# Altium PCB telemetry_RF_pcb_r4.PcbDoc (part 3 of 3)
Units mil, origin at the board's own origin, x right, y up, seen from the top; angles counter-clockwise.
Board outline 3620 x 3014 mil, 2 copper layers (Top Layer, Bottom Layer); 34 components, 32 nets, 214 pads, 35 vias.
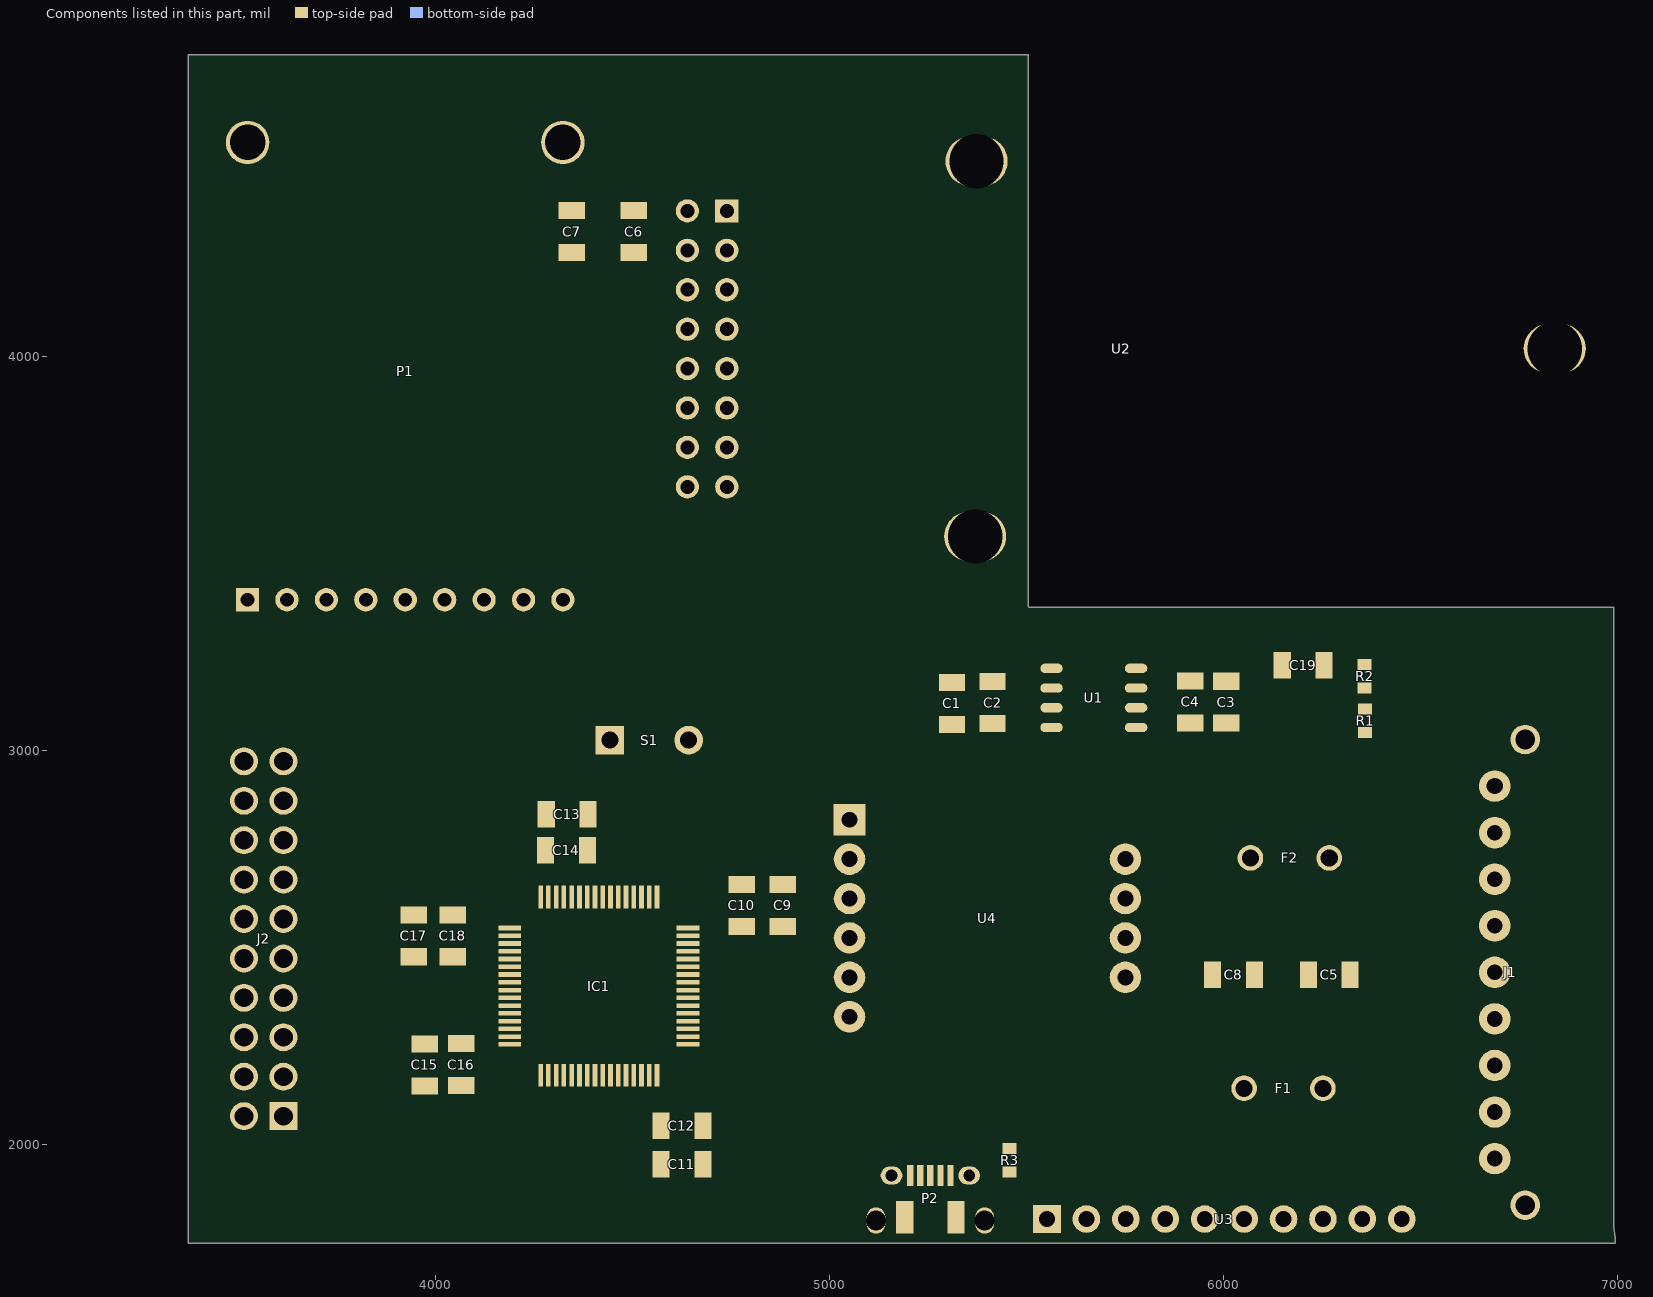
[diagram p3: the components of this part, seen from the top]

## Via types
v1: diameter 20, hole 7.87, Top Layer to Bottom Layer, 21 vias
v2: diameter 20, hole 8, Top Layer to Bottom Layer, 14 vias

## Nets (pads, with @x,y where several pads share a name; then routed paths per layer and width w, separated by ;. In a path a pad name is that pad's centre, name@x,y a point inside that pad or via, vN(x,y) a via of type N, cw(c..) or ccw(c..) an arc to the next point about the centre after c; other vN are vias at no path point) (continued)
copper on no net: (continued)
  Top Layer w1: 4761.84,4598.63 4793.84,4598.63 ; 4761.84,4599.63 4793.84,4599.63 ; 4761.84,4645.63 4775.84,4645.63 ; 4761.84,4692.63 4775.84,4692.63 ; 4762.84,4517.63 4791.84,4517.63 ; 4762.84,4520.63 4763.84,4520.63 ; 4762.84,4560.63 4793.84,4560.63 ; 4762.84,4561.63 4793.84,4561.63 ; 4762.84,4596.63 4793.84,4596.63 ; 4762.84,4597.63 4793.84,4597.63 ; 4762.84,4644.63 4801.84,4644.63 ; 4762.84,4693.63 4781.84,4693.63 ; 4763.84,4518.63 4791.84,4518.63 ; 4763.84,4519.63 4791.84,4519.63 ; 4763.84,4562.63 4793.84,4562.63 ; 4763.84,4563.63 4793.84,4563.63 ; 4763.84,4594.63 4793.84,4594.63 ; 4763.84,4595.63 4793.84,4595.63 ; 4763.84,4694.63 4800.84,4694.63 ; 4764.84,4520.63 4791.84,4520.63 ; 4764.84,4521.63 4792.84,4521.63 ; 4764.84,4539.63 4765.84,4539.63 ; 4764.84,4564.63 4793.84,4564.63 ; 4764.84,4565.63 4793.84,4565.63 ; 4764.84,4592.63 4793.84,4592.63 ; 4764.84,4593.63 4793.84,4593.63 ; 4764.84,4617.63 4765.84,4617.63 ; 4764.84,4643.63 4800.84,4643.63 ; 4765.84,4522.63 4792.84,4522.63 ; 4765.84,4523.63 4792.84,4523.63 ; 4765.84,4524.63 4792.84,4524.63 ; 4765.84,4566.63 4793.84,4566.63 ; 4765.84,4567.63 4793.84,4567.63 ; 4765.84,4568.63 4793.84,4568.63 ; 4765.84,4569.63 4793.84,4569.63 ; 4765.84,4587.63 4793.84,4587.63 ; 4765.84,4588.63 4793.84,4588.63 ; 4765.84,4589.63 4793.84,4589.63 ; 4765.84,4590.63 4793.84,4590.63 ; 4765.84,4591.63 4793.84,4591.63 ; 4765.84,4642.63 4799.84,4642.63 ; 4765.84,4695.63 4799.84,4695.63 ; 4766.84,4525.63 4792.84,4525.63 ; 4766.84,4526.63 4793.84,4526.63 ; 4766.84,4527.63 4793.84,4527.63 ; 4766.84,4528.63 4793.84,4528.63 ; 4766.84,4529.63 4793.84,4529.63 ; 4766.84,4530.63 4793.84,4530.63 ; 4766.84,4531.63 4793.84,4531.63 ; 4766.84,4532.63 4793.84,4532.63 ; 4766.84,4533.63 4793.84,4533.63 ; 4766.84,4534.63 4793.84,4534.63 ; 4766.84,4535.63 4793.84,4535.63 ; 4766.84,4536.63 4793.84,4536.63 ; 4766.84,4537.63 4793.84,4537.63 ; 4766.84,4538.63 4793.84,4538.63 ; 4766.84,4539.63 4793.84,4539.63 ; 4766.84,4540.63 4793.84,4540.63 ; 4766.84,4541.63 4793.84,4541.63 ; 4766.84,4542.63 4793.84,4542.63 ; 4766.84,4570.63 4793.84,4570.63 ; 4766.84,4571.63 4793.84,4571.63 ; 4766.84,4572.63 4793.84,4572.63 ; 4766.84,4573.63 4793.84,4573.63 ; 4766.84,4574.63 4793.84,4574.63 ; 4766.84,4575.63 4793.84,4575.63 ; 4766.84,4576.63 4793.84,4576.63 ; 4766.84,4577.63 4793.84,4577.63 ; 4766.84,4578.63 4793.84,4578.63 ; 4766.84,4579.63 4793.84,4579.63 ; 4766.84,4580.63 4793.84,4580.63 ; 4766.84,4581.63 4793.84,4581.63 ; 4766.84,4582.63 4793.84,4582.63 ; 4766.84,4583.63 4793.84,4583.63 ; 4766.84,4584.63 4793.84,4584.63 ; 4766.84,4585.63 4793.84,4585.63 ; 4766.84,4586.63 4793.84,4586.63 ; 4766.84,4614.63 4793.84,4614.63 ; 4766.84,4615.63 4793.84,4615.63 ; 4766.84,4616.63 4793.84,4616.63 ; 4766.84,4617.63 4793.84,4617.63 ; 4766.84,4618.63 4793.84,4618.63 ; 4766.84,4619.63 4793.84,4619.63 ; 4766.84,4620.63 4793.84,4620.63 ; 4766.84,4621.63 4793.84,4621.63 ; 4766.84,4622.63 4793.84,4622.63 ; 4766.84,4623.63 4793.84,4623.63 ; 4766.84,4624.63 4793.84,4624.63 ; 4766.84,4641.63 4797.84,4641.63 ; 4766.84,4654.63 4767.84,4654.63 ; 4766.84,4696.63 4797.84,4696.63 ; 4767.84,4685.63 4768.84,4685.63 ; 4768.84,4640.63 4795.84,4640.63 ; 4768.84,4651.63 4769.84,4651.63 ; 4768.84,4686.63 4769.84,4686.63 ; 4768.84,4697.63 4796.84,4697.63 ; 4769.84,4650.63 4770.84,4650.63 ; 4769.84,4687.63 4770.84,4687.63 ; 4770.84,4639.63 4793.84,4639.63 ; 4770.84,4649.63 4771.84,4649.63 ; 4770.84,4688.63 4771.84,4688.63 ; 4770.84,4698.63 4794.84,4698.63 ; 4772.84,4699.63 4791.84,4699.63 ; 4773.84,4638.63 4791.84,4638.63 ; 4776.84,4700.63 4787.84,4700.63 ; 4778.84,4637.63 4786.84,4637.63 ; 4779.84,4500.63 4780.84,4500.63 ; 4783.84,4693.63 4801.84,4693.63 ; 4786.84,4507.63 4787.84,4507.63 ; 4788.84,4636.63 4789.84,4636.63 ; 4788.84,4645.63 4802.84,4645.63 ; 4788.84,4692.63 4802.84,4692.63 ; 4789.84,4647.63 4790.84,4647.63 ; 4790.84,4646.63 4803.84,4646.63 ; 4791.84,4689.63 4792.84,4689.63 ; 4791.84,4691.63 4803.84,4691.63 ; 4792.84,4647.63 4804.84,4647.63 ; 4792.84,4649.63 4793.84,4649.63 ; 4792.84,4690.63 4804.84,4690.63 ; 4794.84,4529.63 4795.84,4529.63 ; 4794.84,4648.63 4805.84,4648.63 ; 4794.84,4689.63 4805.84,4689.63 ; 4795.84,4649.63 4805.84,4649.63 ; 4795.84,4652.63 4796.84,4652.63 ; 4795.84,4688.63 4805.84,4688.63 ; 4796.84,4650.63 4806.84,4650.63 ; 4796.84,4653.63 4797.84,4653.63 ; 4796.84,4684.63 4797.84,4684.63 ; 4796.84,4687.63 4806.84,4687.63 ; 4797.84,4651.63 4806.84,4651.63 ; 4797.84,4652.63 4807.84,4652.63 ; 4797.84,4685.63 4807.84,4685.63 ; 4797.84,4686.63 4807.84,4686.63 ; 4798.84,4551.63 4799.84,4551.63 ; 4798.84,4552.63 4799.84,4552.63 ; 4798.84,4561.63 4799.84,4561.63 ; 4798.84,4653.63 4808.84,4653.63 ; 4798.84,4654.63 4808.84,4654.63 ; 4798.84,4680.63 4799.84,4680.63 ; 4798.84,4684.63 4808.84,4684.63 ; 4799.84,4655.63 4808.84,4655.63 ; 4799.84,4656.63 4809.84,4656.63 ; 4799.84,4682.63 4808.84,4682.63 ; 4799.84,4683.63 4808.84,4683.63 ; 4800.84,4549.63 4831.84,4549.63 ; 4800.84,4550.63 4830.84,4550.63 ; 4800.84,4551.63 4829.84,4551.63 ; 4800.84,4552.63 4829.84,4552.63 ; 4800.84,4553.63 4828.84,4553.63 ; 4800.84,4554.63 4828.84,4554.63 ; 4800.84,4555.63 4828.84,4555.63 ; 4800.84,4556.63 4828.84,4556.63 ; 4800.84,4557.63 4828.84,4557.63 ; 4800.84,4558.63 4828.84,4558.63 ; 4800.84,4559.63 4828.84,4559.63 ; 4800.84,4560.63 4828.84,4560.63 ; 4800.84,4561.63 4828.84,4561.63 ; 4800.84,4562.63 4829.84,4562.63 ; 4800.84,4563.63 4829.84,4563.63 ; 4800.84,4564.63 4830.84,4564.63 ; 4800.84,4657.63 4809.84,4657.63 ; 4800.84,4658.63 4809.84,4658.63 ; 4800.84,4665.63 4801.84,4665.63 ; 4800.84,4672.63 4801.84,4672.63 ; 4800.84,4679.63 4809.84,4679.63 ; 4800.84,4680.63 4809.84,4680.63 ; 4800.84,4681.63 4809.84,4681.63 ; 4801.84,4546.63 4838.84,4546.63 ; 4801.84,4547.63 4834.84,4547.63 ; 4801.84,4548.63 4832.84,4548.63 ; 4801.84,4565.63 4830.84,4565.63 ; 4801.84,4566.63 4831.84,4566.63 ; 4801.84,4567.63 4833.84,4567.63 ; 4801.84,4659.63 4810.84,4659.63 ; 4801.84,4660.63 4810.84,4660.63 ; 4801.84,4661.63 4810.84,4661.63 ; 4801.84,4662.63 4810.84,4662.63 ; 4801.84,4675.63 4810.84,4675.63 ; 4801.84,4676.63 4810.84,4676.63 ; 4801.84,4677.63 4810.84,4677.63 ; 4801.84,4678.63 4810.84,4678.63 ; 4802.84,4543.63 4893.84,4543.63 ; 4802.84,4544.63 4893.84,4544.63 ; 4802.84,4545.63 4893.84,4545.63 ; 4802.84,4568.63 4834.84,4568.63 ; 4802.84,4569.63 4837.84,4569.63 ; 4802.84,4663.63 4810.84,4663.63 ; 4802.84,4664.63 4810.84,4664.63 ; 4802.84,4665.63 4811.84,4665.63 ; 4802.84,4666.63 4811.84,4666.63 ; 4802.84,4667.63 4811.84,4667.63 ; 4802.84,4668.63 4811.84,4668.63 ; 4802.84,4669.63 4811.84,4669.63 ; 4802.84,4670.63 4811.84,4670.63 ; 4802.84,4671.63 4811.84,4671.63 ; 4802.84,4672.63 4811.84,4672.63 ; 4802.84,4673.63 4810.84,4673.63 ; 4802.84,4674.63 4810.84,4674.63 ; 4803.84,4541.63 4893.84,4541.63 ; 4803.84,4542.63 4893.84,4542.63 ; 4803.84,4570.63 4840.84,4570.63 ; 4803.84,4571.63 4845.84,4571.63 ; 4803.84,4596.63 4831.84,4596.63 ; 4803.84,4597.63 4831.84,4597.63 ; 4803.84,4598.63 4831.84,4598.63 ; 4803.84,4599.63 4831.84,4599.63 ; 4803.84,4600.63 4831.84,4600.63 ; 4803.84,4601.63 4832.84,4601.63 ; 4803.84,4602.63 4832.84,4602.63 ; 4804.84,4540.63 4894.84,4540.63 ; 4804.84,4572.63 4852.84,4572.63 ; 4804.84,4603.63 4833.84,4603.63 ; 4804.84,4604.63 4833.84,4604.63 ; 4804.84,4605.63 4834.84,4605.63 ; 4804.84,4606.63 4834.84,4606.63 ; 4804.84,4646.63 4805.84,4646.63 ; 4805.84,4538.63 4894.84,4538.63 ; 4805.84,4539.63 4894.84,4539.63 ; 4805.84,4573.63 4858.84,4573.63 ; 4805.84,4607.63 4836.84,4607.63 ; 4805.84,4608.63 4837.84,4608.63 ; 4806.84,4537.63 4865.84,4537.63 ; 4806.84,4574.63 4861.84,4574.63 ; 4806.84,4575.63 4864.84,4575.63 ; 4806.84,4609.63 4839.84,4609.63 ; 4806.84,4610.63 4843.84,4610.63 ; 4807.84,4536.63 4864.84,4536.63 ; 4807.84,4576.63 4893.84,4576.63 ; 4807.84,4611.63 4891.84,4611.63 ; 4807.84,4612.63 4891.84,4612.63 ; 4808.84,4535.63 4863.84,4535.63 ; 4808.84,4613.63 4890.84,4613.63 ; 4809.84,4577.63 4893.84,4577.63 ; 4809.84,4614.63 4890.84,4614.63 ; 4810.84,4534.63 4861.84,4534.63 ; 4810.84,4578.63 4893.84,4578.63 ; 4810.84,4615.63 4889.84,4615.63 ; 4811.84,4533.63 4860.84,4533.63 ; 4811.84,4579.63 4893.84,4579.63 ; 4811.84,4616.63 4889.84,4616.63 ; 4811.84,4661.63 4812.84,4661.63 ; 4811.84,4676.63 4812.84,4676.63 ; 4812.84,4532.63 4858.84,4532.63 ; 4812.84,4617.63 4888.84,4617.63 ; 4813.84,4580.63 4893.84,4580.63 ; 4813.84,4618.63 4887.84,4618.63 ; 4814.84,4531.63 4856.84,4531.63 ; 4814.84,4619.63 4886.84,4619.63 ; 4815.84,4581.63 4893.84,4581.63 ; 4815.84,4620.63 4885.84,4620.63 ; 4816.84,4530.63 4853.84,4530.63 ; 4816.84,4621.63 4884.84,4621.63 ; 4817.84,4582.63 4893.84,4582.63 ; 4818.84,4622.63 4882.84,4622.63 ; 4818.84,4639.63 4827.84,4639.63 ; 4818.84,4640.63 4827.84,4640.63 ; 4818.84,4641.63 4827.84,4641.63 ; 4818.84,4642.63 4827.84,4642.63 ; 4818.84,4643.63 4827.84,4643.63 ; 4818.84,4644.63 4827.84,4644.63 ; 4818.84,4645.63 4827.84,4645.63 ; 4818.84,4646.63 4827.84,4646.63 ; 4818.84,4647.63 4827.84,4647.63 ; 4818.84,4648.63 4827.84,4648.63 ; 4818.84,4649.63 4827.84,4649.63 ; 4818.84,4650.63 4827.84,4650.63 ; 4818.84,4651.63 4827.84,4651.63 ; 4818.84,4652.63 4827.84,4652.63 ; 4818.84,4653.63 4827.84,4653.63 ; 4818.84,4654.63 4827.84,4654.63 ; 4818.84,4655.63 4827.84,4655.63 ; 4818.84,4656.63 4827.84,4656.63 ; 4818.84,4657.63 4827.84,4657.63 ; 4818.84,4658.63 4827.84,4658.63 ; 4818.84,4659.63 4827.84,4659.63 ; 4818.84,4660.63 4827.84,4660.63 ; 4818.84,4661.63 4827.84,4661.63 ; 4818.84,4662.63 4827.84,4662.63 ; 4818.84,4663.63 4827.84,4663.63 ; 4818.84,4664.63 4827.84,4664.63 ; 4818.84,4665.63 4827.84,4665.63 ; 4818.84,4666.63 4827.84,4666.63 ; 4818.84,4667.63 4827.84,4667.63 ; 4818.84,4668.63 4827.84,4668.63 ; 4818.84,4669.63 4827.84,4669.63 ; 4818.84,4670.63 4827.84,4670.63 ; 4818.84,4671.63 4827.84,4671.63 ; 4818.84,4672.63 4827.84,4672.63 ; 4818.84,4673.63 4827.84,4673.63 ; 4818.84,4674.63 4827.84,4674.63 ; 4818.84,4675.63 4827.84,4675.63 ; 4818.84,4676.63 4827.84,4676.63 ; 4818.84,4677.63 4827.84,4677.63 ; 4818.84,4678.63 4827.84,4678.63 ; 4818.84,4679.63 4827.84,4679.63 ; 4818.84,4680.63 4827.84,4680.63 ; 4818.84,4681.63 4827.84,4681.63 ; 4818.84,4682.63 4827.84,4682.63 ; 4818.84,4683.63 4827.84,4683.63 ; 4818.84,4684.63 4827.84,4684.63 ; 4818.84,4685.63 4827.84,4685.63 ; 4818.84,4686.63 4827.84,4686.63 ; 4818.84,4687.63 4827.84,4687.63 ; 4818.84,4688.63 4827.84,4688.63 ; 4818.84,4689.63 4827.84,4689.63 ; 4818.84,4690.63 4827.84,4690.63 ; 4818.84,4691.63 4827.84,4691.63 ; 4818.84,4692.63 4827.84,4692.63 ; 4818.84,4693.63 4827.84,4693.63 ; 4818.84,4694.63 4827.84,4694.63 ; 4818.84,4695.63 4827.84,4695.63 ; 4818.84,4696.63 4827.84,4696.63 ; 4818.84,4697.63 4827.84,4697.63 ; 4818.84,4698.63 4827.84,4698.63 ; 4818.84,4699.63 4827.84,4699.63 ; 4818.84,4700.63 4827.84,4700.63 ; 4818.84,4701.63 4827.84,4701.63 ; 4818.84,4702.63 4827.84,4702.63 ; 4818.84,4703.63 4827.84,4703.63 ; 4818.84,4704.63 4827.84,4704.63 ; 4818.84,4705.63 4827.84,4705.63 ; 4818.84,4706.63 4827.84,4706.63 ; 4818.84,4707.63 4827.84,4707.63 ; 4818.84,4708.63 4827.84,4708.63 ; 4818.84,4709.63 4827.84,4709.63 ; 4818.84,4710.63 4827.84,4710.63 ; 4818.84,4711.63 4827.84,4711.63 ; 4818.84,4712.63 4827.84,4712.63 ; 4818.84,4713.63 4827.84,4713.63 ; 4818.84,4714.63 4827.84,4714.63 ; 4818.84,4715.63 4827.84,4715.63 ; 4818.84,4716.63 4827.84,4716.63 ; 4818.84,4717.63 4827.84,4717.63 ; 4818.84,4718.63 4827.84,4718.63 ; 4818.84,4719.63 4827.84,4719.63 ; 4818.84,4720.63 4827.84,4720.63 ; 4818.84,4721.63 4827.84,4721.63 ; 4819.84,4529.63 4850.84,4529.63 ; 4820.84,4583.63 4893.84,4583.63 ; 4820.84,4623.63 4881.84,4623.63 ; 4822.84,4528.63 4846.84,4528.63 ; 4822.84,4624.63 4879.84,4624.63 ; 4823.84,4584.63 4893.84,4584.63 ; 4824.84,4625.63 4877.84,4625.63 ; 4825.84,4526.63 4826.84,4526.63 ; 4826.84,4626.63 4874.84,4626.63 ; 4828.84,4585.63 4893.84,4585.63 ; 4829.84,4527.63 4839.84,4527.63 ; 4830.84,4563.63 4831.84,4563.63 ; 4830.84,4587.63 4831.84,4587.63 ; 4830.84,4627.63 4871.84,4627.63 ; 4831.84,4550.63 4832.84,4550.63 ; 4833.84,4549.63 4834.84,4549.63 ; 4833.84,4566.63 4834.84,4566.63 ; 4833.84,4586.63 4893.84,4586.63 ; 4834.84,4604.63 4835.84,4604.63 ; 4834.84,4628.63 4867.84,4628.63 ; 4835.84,4605.63 4836.84,4605.63 ; 4836.84,4606.63 4837.84,4606.63 ; 4836.84,4651.63 4846.84,4651.63 ; 4836.84,4652.63 4845.84,4652.63 ; 4836.84,4653.63 4845.84,4653.63 ; 4836.84,4654.63 4845.84,4654.63 ; 4836.84,4655.63 4845.84,4655.63 ; 4836.84,4656.63 4845.84,4656.63 ; 4836.84,4657.63 4845.84,4657.63 ; 4836.84,4658.63 4845.84,4658.63 ; 4837.84,4630.63 4838.84,4630.63 ; 4837.84,4648.63 4848.84,4648.63 ; 4837.84,4649.63 4847.84,4649.63 ; 4837.84,4650.63 4846.84,4650.63 ; 4837.84,4659.63 4846.84,4659.63 ; 4837.84,4660.63 4846.84,4660.63 ; 4837.84,4661.63 4847.84,4661.63 ; 4838.84,4646.63 4850.84,4646.63 ; 4838.84,4647.63 4849.84,4647.63 ; 4838.84,4662.63 4848.84,4662.63 ; 4838.84,4663.63 4850.84,4663.63 ; 4839.84,4645.63 4852.84,4645.63 ; 4839.84,4664.63 4852.84,4664.63 ; 4839.84,4680.63 4847.84,4680.63 ; 4839.84,4681.63 4847.84,4681.63 ; 4839.84,4682.63 4848.84,4682.63 ; 4839.84,4683.63 4848.84,4683.63 ; 4839.84,4684.63 4848.84,4684.63 ; 4840.84,4643.63 4874.84,4643.63 ; 4840.84,4644.63 4875.84,4644.63 ; 4840.84,4665.63 4855.84,4665.63 ; 4840.84,4666.63 4859.84,4666.63 ; 4840.84,4685.63 4848.84,4685.63 ; 4840.84,4686.63 4849.84,4686.63 ; 4840.84,4687.63 4849.84,4687.63 ; 4841.84,4569.63 4842.84,4569.63 ; 4841.84,4587.63 4893.84,4587.63 ; 4841.84,4629.63 4858.84,4629.63 ; 4841.84,4642.63 4873.84,4642.63 ; 4841.84,4688.63 4850.84,4688.63 ; 4841.84,4689.63 4851.84,4689.63 ; 4842.84,4547.63 4843.84,4547.63 ; 4842.84,4641.63 4872.84,4641.63 ; 4842.84,4667.63 4866.84,4667.63 ; 4842.84,4690.63 4852.84,4690.63 ; 4842.84,4691.63 4853.84,4691.63 ; 4843.84,4668.63 4872.84,4668.63 ; 4843.84,4692.63 4856.84,4692.63 ; 4844.84,4547.63 4846.84,4547.63 ; 4844.84,4640.63 4871.84,4640.63 ; 4844.84,4669.63 4876.84,4669.63 ; 4844.84,4693.63 4862.84,4693.63 ; 4845.84,4694.63 4882.84,4694.63 ; 4846.84,4639.63 4869.84,4639.63 ; 4846.84,4670.63 4886.84,4670.63 ; 4846.84,4695.63 4881.84,4695.63 ; 4847.84,4650.63 4848.84,4650.63 ; 4847.84,4660.63 4848.84,4660.63 ; 4847.84,4696.63 4880.84,4696.63 ; 4848.84,4638.63 4866.84,4638.63 ; 4848.84,4649.63 4849.84,4649.63 ; 4848.84,4661.63 4849.84,4661.63 ; 4849.84,4546.63 4893.84,4546.63 ; 4849.84,4648.63 4850.84,4648.63 ; 4849.84,4671.63 4886.84,4671.63 ; 4849.84,4697.63 4879.84,4697.63 ; 4850.84,4588.63 4893.84,4588.63 ; 4850.84,4662.63 4851.84,4662.63 ; 4850.84,4687.63 4851.84,4687.63 ; 4850.84,4698.63 4877.84,4698.63 ; 4851.84,4688.63 4852.84,4688.63 ; 4852.84,4689.63 4853.84,4689.63 ; 4853.84,4547.63 4893.84,4547.63 ; 4853.84,4637.63 4861.84,4637.63 ; 4853.84,4672.63 4886.84,4672.63 ; 4853.84,4699.63 4874.84,4699.63 ; 4854.84,4549.63 4855.84,4549.63 ; 4854.84,4610.63 4892.84,4610.63 ; 4855.84,4589.63 4893.84,4589.63 ; 4856.84,4548.63 4893.84,4548.63 ; 4856.84,4550.63 4857.84,4550.63 ; 4857.84,4549.63 4893.84,4549.63 ; 4857.84,4551.63 4858.84,4551.63 ; 4858.84,4550.63 4893.84,4550.63 ; 4858.84,4552.63 4859.84,4552.63 ; 4858.84,4590.63 4893.84,4590.63 ; 4858.84,4609.63 4892.84,4609.63 ; 4858.84,4700.63 4870.84,4700.63 ; 4859.84,4553.63 4860.84,4553.63 ; 4859.84,4607.63 4860.84,4607.63 ; 4859.84,4673.63 4886.84,4673.63 ; 4860.84,4551.63 4893.84,4551.63 ; 4860.84,4552.63 4893.84,4552.63 ; 4860.84,4606.63 4861.84,4606.63 ; 4860.84,4608.63 4892.84,4608.63 ; 4861.84,4553.63 4893.84,4553.63 ; 4861.84,4591.63 4893.84,4591.63 ; 4861.84,4593.63 4862.84,4593.63 ; 4861.84,4605.63 4862.84,4605.63 ; 4862.84,4554.63 4893.84,4554.63 ; 4862.84,4555.63 4893.84,4555.63 ; 4862.84,4592.63 4893.84,4592.63 ; 4862.84,4594.63 4863.84,4594.63 ; 4862.84,4606.63 4893.84,4606.63 ; 4862.84,4607.63 4892.84,4607.63 ; 4862.84,4630.63 4863.84,4630.63 ; 4862.84,4675.63 4863.84,4675.63 ; 4863.84,4556.63 4893.84,4556.63 ; 4863.84,4557.63 4893.84,4557.63 ; 4863.84,4593.63 4893.84,4593.63 ; 4863.84,4605.63 4893.84,4605.63 ; 4864.84,4535.63 4865.84,4535.63 ; 4864.84,4558.63 4893.84,4558.63 ; 4864.84,4559.63 4893.84,4559.63 ; 4864.84,4560.63 4893.84,4560.63 ; 4864.84,4561.63 4893.84,4561.63 ; 4864.84,4562.63 4893.84,4562.63 ; 4864.84,4563.63 4893.84,4563.63 ; 4864.84,4594.63 4893.84,4594.63 ; 4864.84,4595.63 4893.84,4595.63 ; 4864.84,4602.63 4893.84,4602.63 ; 4864.84,4603.63 4893.84,4603.63 ; 4864.84,4604.63 4893.84,4604.63 ; 4864.84,4645.63 4876.84,4645.63 ; 4864.84,4693.63 4883.84,4693.63 ; 4865.84,4564.63 4893.84,4564.63 ; 4865.84,4565.63 4893.84,4565.63 ; 4865.84,4566.63 4893.84,4566.63 ; 4865.84,4567.63 4893.84,4567.63 ; 4865.84,4568.63 4893.84,4568.63 ; 4865.84,4569.63 4893.84,4569.63 ; 4865.84,4570.63 4893.84,4570.63 ; 4865.84,4571.63 4893.84,4571.63 ; 4865.84,4572.63 4893.84,4572.63 ; 4865.84,4573.63 4893.84,4573.63 ; 4865.84,4574.63 4893.84,4574.63 ; 4865.84,4575.63 4893.84,4575.63 ; 4865.84,4596.63 4893.84,4596.63 ; 4865.84,4597.63 4893.84,4597.63 ; 4865.84,4598.63 4893.84,4598.63 ; 4865.84,4599.63 4893.84,4599.63 ; 4865.84,4600.63 4893.84,4600.63 ; 4865.84,4601.63 4893.84,4601.63 ; 4866.84,4535.63 4894.84,4535.63 ; 4866.84,4536.63 4894.84,4536.63 ; 4866.84,4537.63 4894.84,4537.63 ; 4867.84,4531.63 4896.84,4531.63 ; 4867.84,4532.63 4895.84,4532.63 ; 4867.84,4533.63 4895.84,4533.63 ; 4867.84,4534.63 4895.84,4534.63 ; 4867.84,4646.63 4877.84,4646.63 ; 4867.84,4674.63 4886.84,4674.63 ; 4868.84,4530.63 4896.84,4530.63 ; 4869.84,4647.63 4878.84,4647.63 ; 4871.84,4648.63 4887.84,4648.63 ; 4871.84,4650.63 4872.84,4650.63 ; 4871.84,4692.63 4884.84,4692.63 ; 4872.84,4649.63 4886.84,4649.63 ; 4872.84,4651.63 4873.84,4651.63 ; 4872.84,4690.63 4873.84,4690.63 ; 4873.84,4650.63 4886.84,4650.63 ; 4873.84,4652.63 4874.84,4652.63 ; 4873.84,4691.63 4884.84,4691.63 ; 4874.84,4651.63 4886.84,4651.63 ; 4874.84,4654.63 4875.84,4654.63 ; 4874.84,4675.63 4886.84,4675.63 ; 4875.84,4652.63 4886.84,4652.63 ; 4875.84,4690.63 4885.84,4690.63 ; 4876.84,4653.63 4886.84,4653.63 ; 4876.84,4654.63 4886.84,4654.63 ; 4876.84,4655.63 4886.84,4655.63 ; 4876.84,4676.63 4886.84,4676.63 ; 4876.84,4688.63 4886.84,4688.63 ; 4876.84,4689.63 4885.84,4689.63 ; 4877.84,4644.63 4878.84,4644.63 ; 4877.84,4656.63 4886.84,4656.63 ; 4877.84,4657.63 4886.84,4657.63 ; 4877.84,4658.63 4886.84,4658.63 ; 4877.84,4677.63 4886.84,4677.63 ; 4877.84,4678.63 4886.84,4678.63 ; 4877.84,4685.63 4886.84,4685.63 ; 4877.84,4686.63 4886.84,4686.63 ; 4877.84,4687.63 4886.84,4687.63 ; 4878.84,4659.63 4886.84,4659.63 ; 4878.84,4660.63 4886.84,4660.63 ; 4878.84,4661.63 4886.84,4661.63 ; 4878.84,4662.63 4886.84,4662.63 ; 4878.84,4663.63 4886.84,4663.63 ; 4878.84,4664.63 4886.84,4664.63 ; 4878.84,4665.63 4886.84,4665.63 ; 4878.84,4666.63 4886.84,4666.63 ; 4878.84,4667.63 4886.84,4667.63 ; 4878.84,4668.63 4886.84,4668.63 ; 4878.84,4669.63 4886.84,4669.63 ; 4878.84,4679.63 4886.84,4679.63 ; 4878.84,4680.63 4886.84,4680.63 ; 4878.84,4681.63 4886.84,4681.63 ; 4878.84,4682.63 4886.84,4682.63 ; 4878.84,4683.63 4886.84,4683.63 ; 4878.84,4684.63 4886.84,4684.63 ; 4879.84,4643.63 4893.84,4643.63 ; 4879.84,4644.63 4893.84,4644.63 ; 4879.84,4645.63 4893.84,4645.63 ; 4879.84,4646.63 4888.84,4646.63 ; 4879.84,4647.63 4887.84,4647.63 ; 4880.84,4642.63 4893.84,4642.63 ; 4881.84,4641.63 4893.84,4641.63 ; 4882.84,4640.63 4893.84,4640.63 ; 4883.84,4639.63 4893.84,4639.63 ; 4885.84,4621.63 4886.84,4621.63 ; 4887.84,4619.63 4888.84,4619.63 ; 4887.84,4686.63 4888.84,4686.63 ; 4888.84,4618.63 4889.84,4618.63 ; 4892.84,4646.63 4893.84,4646.63 ; 4894.84,4546.63 4895.84,4546.63 ; 4894.84,4547.63 4895.84,4547.63 ; 4899.84,4608.63 4963.84,4608.63 ; 4899.84,4609.63 4963.84,4609.63 ; 4899.84,4610.63 4963.84,4610.63 ; 4899.84,4611.63 4963.84,4611.63 ; 4899.84,4612.63 4963.84,4612.63 ; 4899.84,4613.63 4963.84,4613.63 ; 4899.84,4614.63 4963.84,4614.63 ; 4899.84,4615.63 4963.84,4615.63 ; 4899.84,4616.63 4963.84,4616.63 ; 4899.84,4617.63 4963.84,4617.63 ; 4899.84,4618.63 4963.84,4618.63 ; 4899.84,4619.63 4963.84,4619.63 ; 4899.84,4620.63 4963.84,4620.63 ; 4899.84,4621.63 4963.84,4621.63 ; 4899.84,4622.63 4963.84,4622.63 ; 4899.84,4623.63 4963.84,4623.63 ; 4899.84,4624.63 4963.84,4624.63 ; 4899.84,4625.63 4963.84,4625.63 ; 4899.84,4626.63 4963.84,4626.63 ; 4900.84,4639.63 4908.84,4639.63 ; 4900.84,4640.63 4908.84,4640.63 ; 4900.84,4641.63 4908.84,4641.63 ; 4900.84,4642.63 4908.84,4642.63 ; 4900.84,4643.63 4908.84,4643.63 ; 4900.84,4644.63 4908.84,4644.63 ; 4900.84,4645.63 4908.84,4645.63 ; 4900.84,4646.63 4908.84,4646.63 ; 4900.84,4647.63 4908.84,4647.63 ; 4900.84,4648.63 4908.84,4648.63 ; 4900.84,4649.63 4908.84,4649.63 ; 4900.84,4650.63 4908.84,4650.63 ; 4900.84,4651.63 4908.84,4651.63 ; 4900.84,4652.63 4908.84,4652.63 ; 4900.84,4653.63 4908.84,4653.63 ; 4900.84,4654.63 4908.84,4654.63 ; 4900.84,4655.63 4908.84,4655.63 ; 4900.84,4656.63 4908.84,4656.63 ; 4900.84,4657.63 4908.84,4657.63 ; 4900.84,4658.63 4908.84,4658.63 ; 4900.84,4659.63 4908.84,4659.63 ; 4900.84,4660.63 4908.84,4660.63 ; 4900.84,4661.63 4908.84,4661.63 ; 4900.84,4662.63 4908.84,4662.63 ; 4900.84,4663.63 4908.84,4663.63 ; 4900.84,4664.63 4908.84,4664.63 ; 4900.84,4665.63 4908.84,4665.63 ; 4900.84,4666.63 4908.84,4666.63 ; 4900.84,4667.63 4908.84,4667.63 ; 4900.84,4668.63 4908.84,4668.63 ; 4900.84,4669.63 4908.84,4669.63 ; 4900.84,4670.63 4908.84,4670.63 ; 4900.84,4671.63 4908.84,4671.63 ; 4900.84,4672.63 4908.84,4672.63 ; 4900.84,4673.63 4909.84,4673.63 ; 4900.84,4674.63 4909.84,4674.63 ; 4900.84,4675.63 4909.84,4675.63 ; 4900.84,4676.63 4909.84,4676.63 ; 4900.84,4677.63 4909.84,4677.63 ; 4900.84,4678.63 4910.84,4678.63 ; 4900.84,4679.63 4910.84,4679.63 ; 4900.84,4680.63 4910.84,4680.63 ; 4900.84,4681.63 4911.84,4681.63 ; 4900.84,4682.63 4912.84,4682.63 ; 4900.84,4683.63 4912.84,4683.63 ; 4900.84,4684.63 4913.84,4684.63 ; 4900.84,4685.63 4914.84,4685.63 ; 4900.84,4686.63 4915.84,4686.63 ; 4900.84,4687.63 4916.84,4687.63 ; 4900.84,4688.63 4908.84,4688.63 ; 4900.84,4689.63 4908.84,4689.63 ; 4900.84,4690.63 4908.84,4690.63 ; 4900.84,4691.63 4908.84,4691.63 ; 4900.84,4692.63 4908.84,4692.63 ; 4900.84,4693.63 4908.84,4693.63 ; 4900.84,4694.63 4908.84,4694.63 ; 4900.84,4695.63 4908.84,4695.63 ; 4900.84,4696.63 4908.84,4696.63 ; 4900.84,4697.63 4908.84,4697.63 ; 4900.84,4698.63 4908.84,4698.63 ; 4909.84,4688.63 4918.84,4688.63 ; 4909.84,4689.63 4919.84,4689.63 ; 4909.84,4692.63 4910.84,4692.63 ; 4910.84,4690.63 4922.84,4690.63 ; 4911.84,4679.63 4912.84,4679.63 ; 4911.84,4691.63 4930.84,4691.63 ; 4911.84,4692.63 4931.84,4692.63 ; 4912.84,4693.63 4931.84,4693.63 ; 4913.84,4683.63 4914.84,4683.63 ; 4913.84,4694.63 4931.84,4694.63 ; 4914.84,4684.63 4915.84,4684.63 ; 4915.84,4685.63 4916.84,4685.63 ; 4915.84,4695.63 4931.84,4695.63 ; 4916.84,4544.63 4963.84,4544.63 ; 4916.84,4545.63 4963.84,4545.63 ; 4916.84,4546.63 4963.84,4546.63 ; 4916.84,4547.63 4963.84,4547.63 ; 4916.84,4548.63 4963.84,4548.63 ; 4916.84,4549.63 4963.84,4549.63 ; 4916.84,4550.63 4963.84,4550.63 ; 4916.84,4551.63 4948.84,4551.63 ; 4916.84,4552.63 4946.84,4552.63 ; 4916.84,4553.63 4945.84,4553.63 ; 4916.84,4554.63 4945.84,4554.63 ; 4916.84,4555.63 4944.84,4555.63 ; 4916.84,4556.63 4944.84,4556.63 ; 4916.84,4557.63 4944.84,4557.63 ; 4916.84,4558.63 4944.84,4558.63 ; 4916.84,4559.63 4944.84,4559.63 ; 4916.84,4560.63 4944.84,4560.63 ; 4916.84,4561.63 4944.84,4561.63 ; 4916.84,4562.63 4944.84,4562.63 ; 4916.84,4563.63 4944.84,4563.63 ; 4916.84,4564.63 4944.84,4564.63 ; 4916.84,4565.63 4944.84,4565.63 ; 4916.84,4566.63 4944.84,4566.63 ; 4916.84,4567.63 4944.84,4567.63 ; 4916.84,4568.63 4944.84,4568.63 ; 4916.84,4569.63 4944.84,4569.63 ; 4916.84,4570.63 4944.84,4570.63 ; 4916.84,4571.63 4944.84,4571.63 ; 4916.84,4572.63 4944.84,4572.63 ; 4916.84,4573.63 4944.84,4573.63 ; 4916.84,4574.63 4944.84,4574.63 ; 4916.84,4575.63 4944.84,4575.63 ; 4916.84,4576.63 4944.84,4576.63 ; 4916.84,4577.63 4944.84,4577.63 ; 4916.84,4578.63 4944.84,4578.63 ; 4916.84,4579.63 4944.84,4579.63 ; 4916.84,4580.63 4944.84,4580.63 ; 4916.84,4581.63 4944.84,4581.63 ; 4916.84,4582.63 4944.84,4582.63 ; 4916.84,4583.63 4944.84,4583.63 ; 4916.84,4584.63 4944.84,4584.63 ; 4916.84,4585.63 4944.84,4585.63 ; 4916.84,4586.63 4944.84,4586.63 ; 4916.84,4587.63 4944.84,4587.63 ; 4916.84,4588.63 4944.84,4588.63 ; 4916.84,4589.63 4944.84,4589.63 ; 4916.84,4590.63 4944.84,4590.63 ; 4916.84,4591.63 4944.84,4591.63 ; 4916.84,4592.63 4944.84,4592.63 ; 4916.84,4593.63 4944.84,4593.63 ; 4916.84,4594.63 4944.84,4594.63 ; 4916.84,4595.63 4944.84,4595.63 ; 4916.84,4596.63 4944.84,4596.63 ; 4916.84,4597.63 4944.84,4597.63 ; 4916.84,4598.63 4944.84,4598.63 ; 4916.84,4599.63 4944.84,4599.63 ; 4916.84,4600.63 4944.84,4600.63 ; 4916.84,4601.63 4944.84,4601.63 ; 4916.84,4602.63 4944.84,4602.63 ; 4916.84,4603.63 4944.84,4603.63 ; 4916.84,4604.63 4944.84,4604.63 ; 4916.84,4605.63 4944.84,4605.63 ; 4916.84,4606.63 4944.84,4606.63 ; 4916.84,4607.63 4944.84,4607.63 ; 4916.84,4627.63 4944.84,4627.63 ; 4916.84,4628.63 4944.84,4628.63 ; 4916.84,4629.63 4944.84,4629.63 ; 4916.84,4630.63 4944.84,4630.63 ; 4916.84,4631.63 4944.84,4631.63 ; 4916.84,4632.63 4944.84,4632.63 ; 4916.84,4633.63 4944.84,4633.63 ; 4916.84,4634.63 4944.84,4634.63 ; 4916.84,4635.63 4944.84,4635.63 ; 4916.84,4636.63 4944.84,4636.63 ; 4916.84,4637.63 4944.84,4637.63 ; 4916.84,4638.63 4944.84,4638.63 ; 4916.84,4639.63 4944.84,4639.63 ; 4916.84,4640.63 4944.84,4640.63 ; 4916.84,4641.63 4944.84,4641.63 ; 4916.84,4642.63 4944.84,4642.63 ; 4916.84,4643.63 4944.84,4643.63 ; 4916.84,4644.63 4944.84,4644.63 ; 4916.84,4645.63 4944.84,4645.63 ; 4916.84,4646.63 4944.84,4646.63 ; 4916.84,4647.63 4944.84,4647.63 ; 4916.84,4648.63 4944.84,4648.63 ; 4916.84,4649.63 4944.84,4649.63 ; 4916.84,4650.63 4944.84,4650.63 ; 4916.84,4651.63 4944.84,4651.63 ; 4916.84,4652.63 4944.84,4652.63 ; 4916.84,4653.63 4944.84,4653.63 ; 4916.84,4654.63 4944.84,4654.63 ; 4916.84,4655.63 4944.84,4655.63 ; 4916.84,4696.63 4931.84,4696.63 ; 4917.84,4541.63 4963.84,4541.63 ; 4917.84,4542.63 4963.84,4542.63 ; 4917.84,4543.63 4963.84,4543.63 ; 4918.84,4540.63 4963.84,4540.63 ; 4918.84,4687.63 4919.84,4687.63 ; 4918.84,4697.63 4931.84,4697.63 ; 4919.84,4538.63 4963.84,4538.63 ; 4919.84,4539.63 4963.84,4539.63 ; 4920.84,4537.63 4963.84,4537.63 ; 4920.84,4688.63 4921.84,4688.63 ; 4920.84,4698.63 4931.84,4698.63 ; 4921.84,4536.63 4963.84,4536.63 ; 4922.84,4535.63 4963.84,4535.63 ; 4923.84,4534.63 4963.84,4534.63 ; 4923.84,4699.63 4931.84,4699.63 ; 4924.84,4533.63 4963.84,4533.63 ; 4926.84,4532.63 4963.84,4532.63 ; 4928.84,4531.63 4963.84,4531.63 ; 4931.84,4530.63 4963.84,4530.63 ; 4936.84,4529.63 4961.84,4529.63 ; 4945.84,4606.63 4946.84,4606.63 ; 4945.84,4628.63 4946.84,4628.63 ; 4946.84,4553.63 4947.84,4553.63 ; 4969.84,4568.63 4998.84,4568.63 ; 4969.84,4569.63 4998.84,4569.63 ; 4969.84,4570.63 4997.84,4570.63 ; 4969.84,4571.63 4997.84,4571.63 ; 4969.84,4572.63 4997.84,4572.63 ; 4969.84,4573.63 4997.84,4573.63 ; 4969.84,4574.63 4997.84,4574.63 ; 4969.84,4575.63 4997.84,4575.63 ; 4969.84,4576.63 4997.84,4576.63 ; 4969.84,4577.63 4997.84,4577.63 ; 4969.84,4578.63 4997.84,4578.63 ; 4969.84,4579.63 4997.84,4579.63 ; 4969.84,4580.63 4997.84,4580.63 ; 4969.84,4581.63 4997.84,4581.63 ; 4969.84,4582.63 4997.84,4582.63 ; 4969.84,4583.63 4997.84,4583.63 ; 4969.84,4584.63 4997.84,4584.63 ; 4969.84,4585.63 4997.84,4585.63 ; 4969.84,4586.63 4998.84,4586.63 ; 4969.84,4587.63 4998.84,4587.63 ; 4969.84,4588.63 4998.84,4588.63 ; 4970.84,4563.63 4999.84,4563.63 ; 4970.84,4564.63 4999.84,4564.63 ; 4970.84,4565.63 4998.84,4565.63 ; 4970.84,4566.63 4998.84,4566.63 ; 4970.84,4567.63 4998.84,4567.63 ; 4970.84,4589.63 4998.84,4589.63 ; 4970.84,4590.63 4998.84,4590.63 ; 4970.84,4591.63 4998.84,4591.63 ; 4970.84,4592.63 4999.84,4592.63 ; 4970.84,4593.63 4999.84,4593.63 ; 4971.84,4560.63 5000.84,4560.63 ; 4971.84,4561.63 5000.84,4561.63 ; 4971.84,4562.63 4999.84,4562.63 ; 4971.84,4594.63 4999.84,4594.63 ; 4971.84,4595.63 5000.84,4595.63 ; 4971.84,4596.63 5000.84,4596.63 ; 4972.84,4557.63 5002.84,4557.63 ; 4972.84,4558.63 5001.84,4558.63 ; 4972.84,4559.63 5001.84,4559.63 ; 4972.84,4597.63 5001.84,4597.63 ; 4972.84,4598.63 5001.84,4598.63 ; 4972.84,4599.63 5002.84,4599.63 ; 4973.84,4555.63 5003.84,4555.63 ; 4973.84,4556.63 5002.84,4556.63 ; 4973.84,4600.63 5003.84,4600.63 ; 4973.84,4601.63 5003.84,4601.63 ; 4974.84,4553.63 5005.84,4553.63 ; 4974.84,4554.63 5004.84,4554.63 ; 4974.84,4602.63 5004.84,4602.63 ; 4974.84,4603.63 5005.84,4603.63 ; 4975.84,4551.63 5008.84,4551.63 ; 4975.84,4552.63 5006.84,4552.63 ; 4975.84,4604.63 5006.84,4604.63 ; 4975.84,4605.63 5008.84,4605.63 ; 4976.84,4549.63 5012.84,4549.63 ; 4976.84,4550.63 5009.84,4550.63 ; 4976.84,4606.63 5010.84,4606.63 ; 4976.84,4607.63 5012.84,4607.63 ; 4977.84,4548.63 5017.84,4548.63 ; 4977.84,4608.63 5017.84,4608.63 ; 4978.84,4546.63 5062.84,4546.63 ; 4978.84,4547.63 5062.84,4547.63 ; 4978.84,4609.63 5062.84,4609.63 ; 4978.84,4610.63 5062.84,4610.63 ; 4979.84,4545.63 5061.84,4545.63 ; 4979.84,4611.63 5061.84,4611.63 ; 4980.84,4544.63 5060.84,4544.63 ; 4980.84,4612.63 5060.84,4612.63 ; 4981.84,4543.63 5059.84,4543.63 ; 4981.84,4613.63 5059.84,4613.63 ; 4982.84,4542.63 5058.84,4542.63 ; 4982.84,4614.63 5058.84,4614.63 ; 4983.84,4541.63 5057.84,4541.63 ; 4983.84,4615.63 5057.84,4615.63 ; 4984.84,4540.63 5056.84,4540.63 ; 4984.84,4616.63 5056.84,4616.63 ; 4985.84,4539.63 5055.84,4539.63 ; 4985.84,4617.63 5055.84,4617.63 ; 4986.84,4538.63 5054.84,4538.63 ; 4986.84,4618.63 5054.84,4618.63 ; 4987.84,4537.63 5053.84,4537.63 ; 4987.84,4619.63 5053.84,4619.63 ; 4988.84,4536.63 5052.84,4536.63 ; 4988.84,4620.63 5052.84,4620.63 ; 4990.84,4535.63 5050.84,4535.63 ; 4990.84,4621.63 5050.84,4621.63 ; 4991.84,4534.63 5048.84,4534.63 ; 4991.84,4622.63 5048.84,4622.63 ; 4993.84,4533.63 5047.84,4533.63 ; 4993.84,4623.63 5047.84,4623.63 ; 4995.84,4532.63 5045.84,4532.63 ; 4995.84,4624.63 5045.84,4624.63 ; 4997.84,4531.63 5043.84,4531.63 ; 4997.84,4625.63 5043.84,4625.63 ; 5000.84,4530.63 5040.84,4530.63 ; 5000.84,4626.63 5040.84,4626.63 ; 5003.84,4529.63 5037.84,4529.63 ; 5003.84,4557.63 5004.84,4557.63 ; 5003.84,4599.63 5004.84,4599.63 ; 5003.84,4627.63 5037.84,4627.63 ; 5006.84,4628.63 5033.84,4628.63 ; 5007.84,4528.63 5033.84,4528.63 ; 5008.84,4552.63 5009.84,4552.63 ; 5008.84,4604.63 5009.84,4604.63 ; 5009.84,4630.63 5010.84,4630.63 ; 5010.84,4605.63 5011.84,4605.63 ; 5013.84,4629.63 5027.84,4629.63 ; 5015.84,4527.63 5025.84,4527.63 ; 5023.84,4548.63 5063.84,4548.63 ; 5023.84,4608.63 5063.84,4608.63 ; 5028.84,4549.63 5064.84,4549.63 ; 5028.84,4607.63 5064.84,4607.63 ; 5030.84,4550.63 5064.84,4550.63 ; 5030.84,4606.63 5064.84,4606.63 ; 5030.84,4630.63 5031.84,4630.63 ; 5031.84,4552.63 5032.84,4552.63 ; 5032.84,4551.63 5065.84,4551.63 ; 5032.84,4603.63 5033.84,4603.63 ; 5032.84,4605.63 5065.84,4605.63 ; 5033.84,4604.63 5065.84,4604.63 ; 5034.84,4552.63 5065.84,4552.63 ; 5035.84,4553.63 5066.84,4553.63 ; 5035.84,4603.63 5066.84,4603.63 ; 5036.84,4554.63 5066.84,4554.63 ; 5036.84,4557.63 5037.84,4557.63 ; 5036.84,4599.63 5037.84,4599.63 ; 5036.84,4602.63 5066.84,4602.63 ; 5037.84,4555.63 5067.84,4555.63 ; 5037.84,4556.63 5067.84,4556.63 ; 5037.84,4600.63 5067.84,4600.63 ; 5037.84,4601.63 5067.84,4601.63 ; 5038.84,4557.63 5068.84,4557.63 ; 5038.84,4599.63 5068.84,4599.63 ; 5039.84,4558.63 5068.84,4558.63 ; 5039.84,4559.63 5068.84,4559.63 ; 5039.84,4597.63 5068.84,4597.63 ; 5039.84,4598.63 5068.84,4598.63 ; 5040.84,4560.63 5069.84,4560.63 ; 5040.84,4561.63 5069.84,4561.63 ; 5040.84,4567.63 5041.84,4567.63 ; 5040.84,4589.63 5041.84,4589.63 ; 5040.84,4595.63 5069.84,4595.63 ; 5040.84,4596.63 5069.84,4596.63 ; 5041.84,4562.63 5069.84,4562.63 ; 5041.84,4563.63 5070.84,4563.63 ; 5041.84,4564.63 5070.84,4564.63 ; 5041.84,4592.63 5070.84,4592.63 ; 5041.84,4593.63 5069.84,4593.63 ; 5041.84,4594.63 5069.84,4594.63 ; 5042.84,4565.63 5070.84,4565.63 ; 5042.84,4566.63 5070.84,4566.63 ; 5042.84,4567.63 5070.84,4567.63 ; 5042.84,4568.63 5071.84,4568.63 ; 5042.84,4569.63 5071.84,4569.63 ; 5042.84,4570.63 5071.84,4570.63 ; 5042.84,4586.63 5071.84,4586.63 ; 5042.84,4587.63 5071.84,4587.63 ; 5042.84,4588.63 5071.84,4588.63 ; 5042.84,4589.63 5070.84,4589.63 ; 5042.84,4590.63 5070.84,4590.63 ; 5042.84,4591.63 5070.84,4591.63 ; 5043.84,4571.63 5071.84,4571.63 ; 5043.84,4572.63 5071.84,4572.63 ; 5043.84,4573.63 5071.84,4573.63 ; 5043.84,4574.63 5071.84,4574.63 ; 5043.84,4575.63 5071.84,4575.63 ; 5043.84,4576.63 5071.84,4576.63 ; 5043.84,4577.63 5071.84,4577.63 ; 5043.84,4578.63 5071.84,4578.63 ; 5043.84,4579.63 5071.84,4579.63 ; 5043.84,4580.63 5071.84,4580.63 ; 5043.84,4581.63 5071.84,4581.63 ; 5043.84,4582.63 5071.84,4582.63 ; 5043.84,4583.63 5071.84,4583.63 ; 5043.84,4584.63 5071.84,4584.63 ; 5043.84,4585.63 5071.84,4585.63 ; 5053.84,4536.63 5054.84,4536.63 ; 5072.84,4572.63 5073.84,4572.63 ; 5072.84,4583.63 5073.84,4583.63 ; 5072.84,4584.63 5073.84,4584.63 ; 5081.84,4529.63 5109.84,4529.63 ; 5081.84,4530.63 5109.84,4530.63 ; 5081.84,4531.63 5109.84,4531.63 ; 5081.84,4532.63 5109.84,4532.63 ; 5081.84,4533.63 5109.84,4533.63 ; 5081.84,4534.63 5109.84,4534.63 ; 5081.84,4535.63 5109.84,4535.63 ; 5081.84,4536.63 5109.84,4536.63 ; 5081.84,4537.63 5109.84,4537.63 ; 5081.84,4538.63 5109.84,4538.63 ; 5081.84,4539.63 5109.84,4539.63 ; 5081.84,4540.63 5109.84,4540.63 ; 5081.84,4541.63 5109.84,4541.63 ; 5081.84,4542.63 5109.84,4542.63 ; 5081.84,4543.63 5109.84,4543.63 ; 5081.84,4544.63 5109.84,4544.63 ; 5081.84,4545.63 5109.84,4545.63 ; 5081.84,4546.63 5109.84,4546.63 ; 5081.84,4547.63 5109.84,4547.63 ; 5081.84,4548.63 5109.84,4548.63 ; 5081.84,4549.63 5109.84,4549.63 ; 5081.84,4550.63 5109.84,4550.63 ; 5081.84,4551.63 5109.84,4551.63 ; 5081.84,4552.63 5109.84,4552.63 ; 5081.84,4553.63 5109.84,4553.63 ; 5081.84,4554.63 5109.84,4554.63 ; 5081.84,4555.63 5109.84,4555.63 ; 5081.84,4556.63 5109.84,4556.63 ; 5081.84,4557.63 5109.84,4557.63 ; 5081.84,4558.63 5109.84,4558.63 ; 5081.84,4559.63 5109.84,4559.63 ; 5081.84,4560.63 5109.84,4560.63 ; 5081.84,4561.63 5109.84,4561.63 ; 5081.84,4562.63 5109.84,4562.63 ; 5081.84,4563.63 5109.84,4563.63 ; 5081.84,4564.63 5109.84,4564.63 ; 5081.84,4565.63 5109.84,4565.63 ; 5081.84,4566.63 5109.84,4566.63 ; 5081.84,4567.63 5109.84,4567.63 ; 5081.84,4568.63 5109.84,4568.63 ; 5081.84,4569.63 5109.84,4569.63 ; 5081.84,4570.63 5109.84,4570.63 ; 5081.84,4571.63 5109.84,4571.63 ; 5081.84,4572.63 5109.84,4572.63 ; 5081.84,4573.63 5109.84,4573.63 ; 5081.84,4574.63 5109.84,4574.63 ; 5081.84,4575.63 5109.84,4575.63 ; 5081.84,4576.63 5109.84,4576.63 ; 5081.84,4577.63 5109.84,4577.63 ; 5081.84,4578.63 5109.84,4578.63 ; 5081.84,4579.63 5109.84,4579.63 ; 5081.84,4580.63 5109.84,4580.63 ; 5081.84,4581.63 5109.84,4581.63 ; 5081.84,4582.63 5110.84,4582.63 ; 5081.84,4583.63 5110.84,4583.63 ; 5081.84,4584.63 5110.84,4584.63 ; 5081.84,4585.63 5110.84,4585.63 ; 5081.84,4586.63 5111.84,4586.63 ; 5081.84,4587.63 5111.84,4587.63 ; 5081.84,4588.63 5111.84,4588.63 ; 5081.84,4589.63 5112.84,4589.63 ; 5081.84,4590.63 5112.84,4590.63 ; 5081.84,4591.63 5113.84,4591.63 ; 5081.84,4592.63 5113.84,4592.63 ; 5081.84,4593.63 5114.84,4593.63 ; 5081.84,4594.63 5115.84,4594.63 ; 5081.84,4595.63 5115.84,4595.63 ; 5081.84,4596.63 5116.84,4596.63 ; 5081.84,4597.63 5117.84,4597.63 ; 5081.84,4598.63 5119.84,4598.63 ; 5081.84,4599.63 5120.84,4599.63 ; 5081.84,4600.63 5122.84,4600.63 ; 5081.84,4601.63 5125.84,4601.63 ; 5081.84,4602.63 5129.84,4602.63 ; 5081.84,4603.63 5145.84,4603.63 ; 5081.84,4604.63 5145.84,4604.63 ; 5081.84,4605.63 5145.84,4605.63 ; 5081.84,4606.63 5145.84,4606.63 ; 5081.84,4607.63 5145.84,4607.63 ; 5081.84,4608.63 5145.84,4608.63 ; 5081.84,4609.63 5145.84,4609.63 ; 5081.84,4610.63 5107.84,4610.63 ; 5081.84,4611.63 5107.84,4611.63 ; 5081.84,4612.63 5107.84,4612.63 ; 5081.84,4613.63 5107.84,4613.63 ; 5081.84,4614.63 5107.84,4614.63 ; 5081.84,4615.63 5107.84,4615.63 ; 5081.84,4616.63 5107.84,4616.63 ; 5081.84,4617.63 5107.84,4617.63 ; 5081.84,4618.63 5107.84,4618.63 ; 5081.84,4619.63 5107.84,4619.63 ; 5081.84,4620.63 5107.84,4620.63 ; 5081.84,4621.63 5107.84,4621.63 ; 5081.84,4622.63 5107.84,4622.63 ; 5081.84,4623.63 5107.84,4623.63 ; 5081.84,4624.63 5107.84,4624.63 ; 5081.84,4625.63 5107.84,4625.63 ; 5108.84,4610.63 5145.84,4610.63 ; 5108.84,4611.63 5145.84,4611.63 ; 5109.84,4612.63 5145.84,4612.63 ; 5109.84,4615.63 5110.84,4615.63 ; 5110.84,4577.63 5111.84,4577.63 ; 5110.84,4578.63 5111.84,4578.63 ; 5110.84,4613.63 5145.84,4613.63 ; 5110.84,4614.63 5145.84,4614.63 ; 5111.84,4615.63 5145.84,4615.63 ; 5112.84,4616.63 5145.84,4616.63 ; 5113.84,4590.63 5114.84,4590.63 ; 5113.84,4617.63 5145.84,4617.63 ; 5114.84,4618.63 5145.84,4618.63 ; 5115.84,4593.63 5116.84,4593.63 ; 5115.84,4619.63 5145.84,4619.63 ; 5116.84,4620.63 5145.84,4620.63 ; 5117.84,4621.63 5145.84,4621.63 ; 5119.84,4597.63 5120.84,4597.63 ; 5119.84,4622.63 5145.84,4622.63 ; 5120.84,4623.63 5145.84,4623.63 ; 5122.84,4624.63 5145.84,4624.63 ; 5124.84,4625.63 5145.84,4625.63 ; 5126.84,4626.63 5145.84,4626.63 ; 5129.84,4627.63 5145.84,4627.63 ; 5133.84,4628.63 5142.84,4628.63 ; 5141.84,4602.63 5145.84,4602.63 ; 5150.84,4555.63 5178.84,4555.63 ; 5150.84,4556.63 5177.84,4556.63 ; 5150.84,4557.63 5177.84,4557.63 ; 5150.84,4558.63 5177.84,4558.63 ; 5150.84,4559.63 5177.84,4559.63 ; 5150.84,4560.63 5177.84,4560.63 ; 5150.84,4561.63 5177.84,4561.63 ; 5151.84,4551.63 5181.84,4551.63 ; 5151.84,4552.63 5180.84,4552.63 ; 5151.84,4553.63 5179.84,4553.63 ; 5151.84,4554.63 5178.84,4554.63 ; 5152.84,4549.63 5183.84,4549.63 ; 5152.84,4550.63 5182.84,4550.63 ; 5152.84,4594.63 5187.84,4594.63 ; 5152.84,4595.63 5185.84,4595.63 ; 5152.84,4596.63 5184.84,4596.63 ; 5152.84,4597.63 5182.84,4597.63 ; 5152.84,4598.63 5181.84,4598.63 ; 5152.84,4599.63 5181.84,4599.63 ; 5152.84,4600.63 5181.84,4600.63 ; 5152.84,4601.63 5180.84,4601.63 ; 5152.84,4602.63 5180.84,4602.63 ; 5152.84,4603.63 5180.84,4603.63 ; 5153.84,4547.63 5187.84,4547.63 ; 5153.84,4548.63 5185.84,4548.63 ; 5153.84,4590.63 5203.84,4590.63 ; 5153.84,4591.63 5198.84,4591.63 ; 5153.84,4592.63 5194.84,4592.63 ; 5153.84,4593.63 5190.84,4593.63 ; 5153.84,4604.63 5180.84,4604.63 ; 5153.84,4605.63 5181.84,4605.63 ; 5153.84,4606.63 5181.84,4606.63 ; 5153.84,4607.63 5182.84,4607.63 ; 5153.84,4608.63 5183.84,4608.63 ; 5154.84,4545.63 5238.84,4545.63 ; 5154.84,4546.63 5192.84,4546.63 ; 5154.84,4588.63 5212.84,4588.63 ; 5154.84,4589.63 5208.84,4589.63 ; 5154.84,4609.63 5185.84,4609.63 ; 5154.84,4610.63 5189.84,4610.63 ; 5155.84,4544.63 5237.84,4544.63 ; 5155.84,4586.63 5219.84,4586.63 ; 5155.84,4587.63 5216.84,4587.63 ; 5155.84,4611.63 5236.84,4611.63 ; 5155.84,4612.63 5235.84,4612.63 ; 5156.84,4540.63 5157.84,4540.63 ; 5156.84,4542.63 5236.84,4542.63 ; 5156.84,4543.63 5237.84,4543.63 ; 5156.84,4585.63 5222.84,4585.63 ; 5156.84,4613.63 5234.84,4613.63 ; 5156.84,4614.63 5234.84,4614.63 ; 5157.84,4541.63 5235.84,4541.63 ; 5157.84,4584.63 5225.84,4584.63 ; 5157.84,4615.63 5233.84,4615.63 ; 5158.84,4538.63 5159.84,4538.63 ; 5158.84,4540.63 5234.84,4540.63 ; 5158.84,4583.63 5227.84,4583.63 ; 5158.84,4616.63 5232.84,4616.63 ; 5159.84,4539.63 5233.84,4539.63 ; 5159.84,4582.63 5229.84,4582.63 ; 5159.84,4617.63 5231.84,4617.63 ; 5160.84,4536.63 5161.84,4536.63 ; 5160.84,4538.63 5232.84,4538.63 ; 5160.84,4581.63 5230.84,4581.63 ; 5160.84,4618.63 5230.84,4618.63 ; 5161.84,4537.63 5231.84,4537.63 ; 5161.84,4580.63 5232.84,4580.63 ; 5161.84,4619.63 5229.84,4619.63 ; 5162.84,4536.63 5230.84,4536.63 ; 5162.84,4620.63 5228.84,4620.63 ; 5163.84,4579.63 5233.84,4579.63 ; 5163.84,4621.63 5227.84,4621.63 ; 5163.84,4623.63 5164.84,4623.63 ; 5164.84,4533.63 5165.84,4533.63 ; 5164.84,4535.63 5229.84,4535.63 ; 5164.84,4578.63 5234.84,4578.63 ; 5164.84,4622.63 5225.84,4622.63 ; 5165.84,4534.63 5227.84,4534.63 ; 5166.84,4577.63 5235.84,4577.63 ; 5166.84,4623.63 5224.84,4623.63 ; 5167.84,4533.63 5226.84,4533.63 ; 5168.84,4576.63 5236.84,4576.63 ; 5168.84,4624.63 5222.84,4624.63 ; 5169.84,4532.63 5224.84,4532.63 ; 5170.84,4625.63 5220.84,4625.63 ; 5171.84,4531.63 5222.84,4531.63 ; 5171.84,4575.63 5237.84,4575.63 ; 5172.84,4626.63 5218.84,4626.63 ; 5174.84,4530.63 5219.84,4530.63 ; 5174.84,4574.63 5238.84,4574.63 ; 5176.84,4627.63 5214.84,4627.63 ; 5177.84,4529.63 5216.84,4529.63 ; 5178.84,4573.63 5239.84,4573.63 ; 5180.84,4553.63 5181.84,4553.63 ; 5180.84,4628.63 5210.84,4628.63 ; 5181.84,4552.63 5182.84,4552.63 ; 5181.84,4572.63 5239.84,4572.63 ; 5182.84,4528.63 5211.84,4528.63 ; 5182.84,4551.63 5183.84,4551.63 ; 5182.84,4599.63 5183.84,4599.63 ; 5183.84,4630.63 5184.84,4630.63 ; 5184.84,4597.63 5185.84,4597.63 ; 5186.84,4526.63 5187.84,4526.63 ; 5186.84,4571.63 5240.84,4571.63 ; 5187.84,4629.63 5203.84,4629.63 ; 5188.84,4569.63 5189.84,4569.63 ; 5190.84,4570.63 5240.84,4570.63 ; 5191.84,4527.63 5202.84,4527.63 ; 5194.84,4569.63 5240.84,4569.63 ; 5195.84,4547.63 5196.84,4547.63 ; 5197.84,4547.63 5198.84,4547.63 ; 5198.84,4568.63 5241.84,4568.63 ; 5199.84,4610.63 5236.84,4610.63 ; 5200.84,4592.63 5201.84,4592.63 ; 5201.84,4546.63 5239.84,4546.63 ; 5202.84,4567.63 5241.84,4567.63 ; 5204.84,4609.63 5237.84,4609.63 ; 5205.84,4547.63 5239.84,4547.63 ; 5205.84,4566.63 5241.84,4566.63 ; 5205.84,4607.63 5206.84,4607.63 ; 5206.84,4526.63 5207.84,4526.63 ; 5206.84,4549.63 5207.84,4549.63 ; 5206.84,4608.63 5237.84,4608.63 ; 5207.84,4565.63 5241.84,4565.63 ; 5207.84,4606.63 5208.84,4606.63 ; 5208.84,4548.63 5239.84,4548.63 ; 5208.84,4550.63 5209.84,4550.63 ; 5208.84,4563.63 5209.84,4563.63 ; 5208.84,4605.63 5209.84,4605.63 ; 5208.84,4607.63 5237.84,4607.63 ; 5209.84,4549.63 5240.84,4549.63 ; 5209.84,4551.63 5210.84,4551.63 ; 5209.84,4564.63 5242.84,4564.63 ; 5209.84,4606.63 5238.84,4606.63 ; 5210.84,4552.63 5211.84,4552.63 ; 5210.84,4605.63 5238.84,4605.63 ; 5211.84,4550.63 5240.84,4550.63 ; 5211.84,4551.63 5240.84,4551.63 ; 5211.84,4560.63 5212.84,4560.63 ; 5211.84,4563.63 5242.84,4563.63 ; 5211.84,4602.63 5239.84,4602.63 ; 5211.84,4603.63 5238.84,4603.63 ; 5211.84,4604.63 5238.84,4604.63 ; 5212.84,4552.63 5241.84,4552.63 ; 5212.84,4562.63 5242.84,4562.63 ; 5212.84,4598.63 5239.84,4598.63 ; 5212.84,4599.63 5239.84,4599.63 ; 5212.84,4600.63 5239.84,4600.63 ; 5212.84,4601.63 5239.84,4601.63 ; 5213.84,4553.63 5241.84,4553.63 ; 5213.84,4554.63 5241.84,4554.63 ; 5213.84,4555.63 5241.84,4555.63 ; 5213.84,4556.63 5241.84,4556.63 ; 5213.84,4559.63 5242.84,4559.63 ; 5213.84,4560.63 5242.84,4560.63 ; 5213.84,4561.63 5242.84,4561.63 ; 5214.84,4557.63 5242.84,4557.63 ; 5214.84,4558.63 5242.84,4558.63 ; 5234.84,4615.63 5235.84,4615.63
  Top Layer w4: 4779.84,4533.63 4783.84,4533.63 ; 5103.84,4533.63 5107.84,4533.63

## Polygon pours and split planes (outlines as drawn)
GND on Top Layer "Top Layer-GND" (solid, remove dead copper, pour order 0): 5506,4765 5506,3364 6992,3364 6992,1751.38 3375,1751.38 3375,4765
no net on Bottom Layer "Bottom Layer-No Net" (solid, pour order 2): 3375,4765 5506,4765 5506,3364 6992,3364 6992,1751.38 3375,1751.38 3375,4765

## Keep-outs
Keep-Out Layer:
  lines w5: 3375,1751.38 6992,1751.38 6992,3364 5506,3364 5506,4765 3375,4765 3375,1751.38

## Other copper
Bottom Layer:
  pour cut-out: 5269.72,3624.62 5269.72,3462.62 5510,3462.62 5510,3624.62
  pour cut-out: 5273.27,4576.28 5273.27,4414.28 5507,4414.28 5507,4576.28
  pour cut-out: 6040,3429
Multi-Layer:
  pour cut-out: 6712,4110 6712,3925 6946,3925 6946,4110
  pour cut-out: 5269.72,3633.62 5269.72,3448.62 5510,3448.62 5510,3633.62
  pour cut-out: 5273.27,4585.28 5273.27,4400.28 5507,4400.28 5507,4585.28

## Text inside footprints (layer, text, board x,y; h text height)
U2: Top Overlay "RFD900X" at 5196.84,3814.34 h60 r90; Top Overlay "1" at 4759.8,4436.1 h50 r90; Top Overlay "2" at 4659.8,4436.1 h50 r90; Top Overlay "15" at 4759.8,3534.45 h50 r90; Top Overlay "16" at 4659.8,3534.45 h50 r90